# EAGLE board esquema (EAGLE 9.6.2)
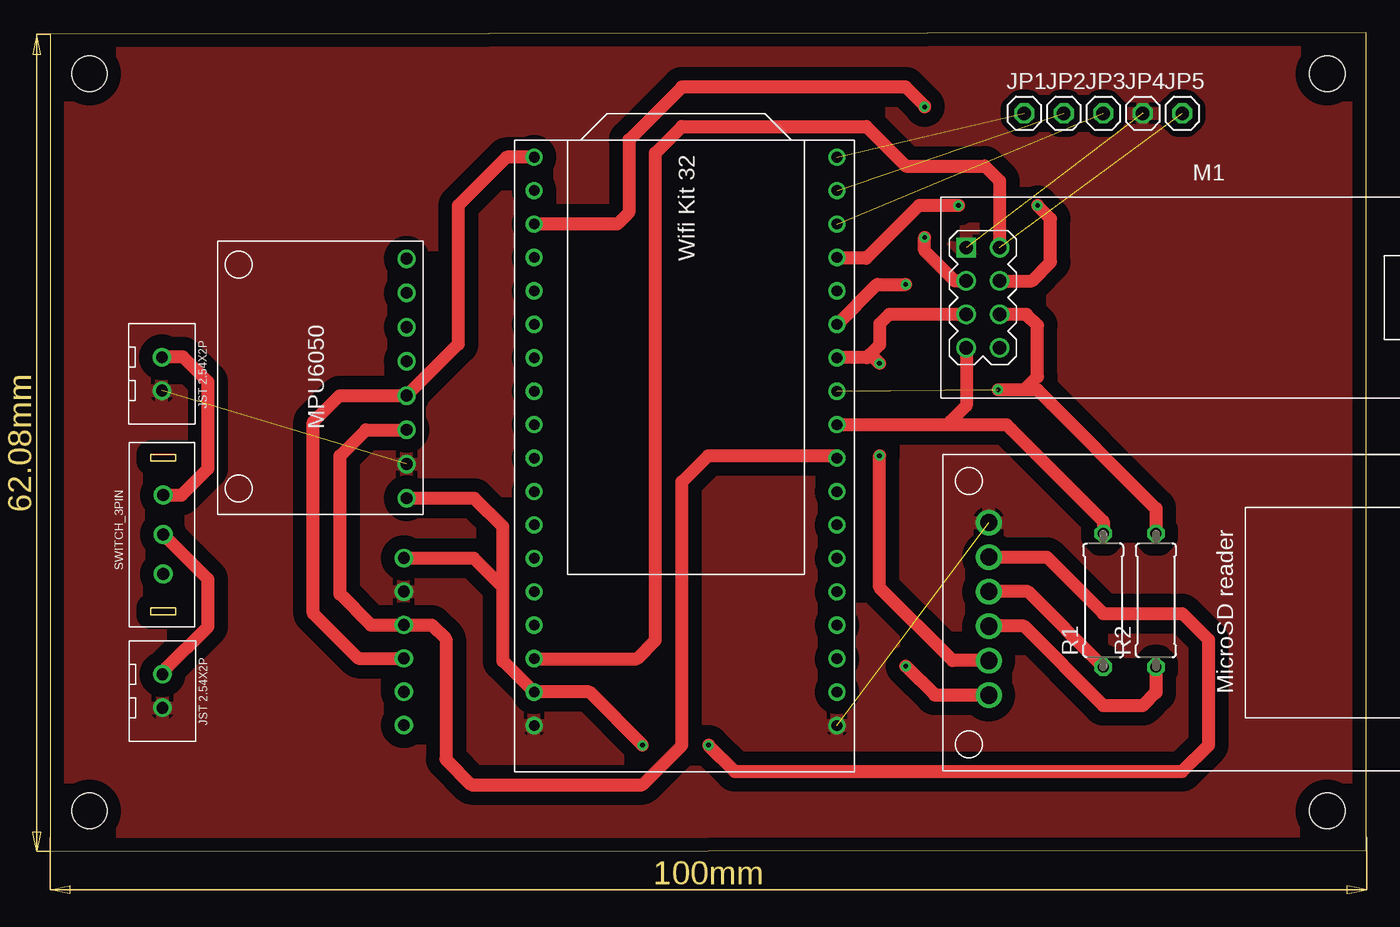
[diagram p0: board, top side]
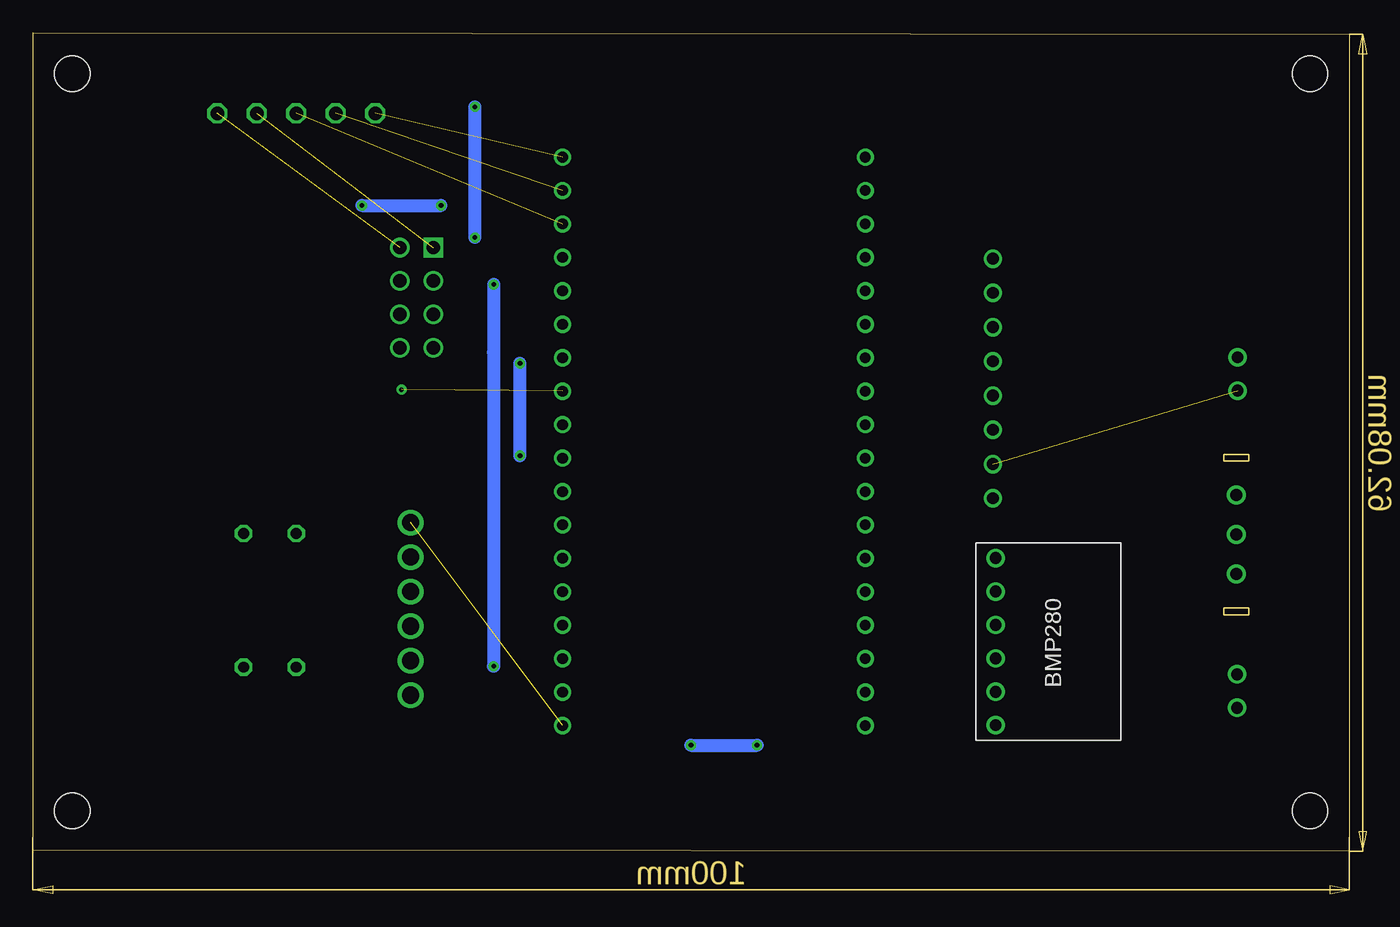
[diagram p1: board, bottom side, seen from below]

Size 99.97 x 62.19 mm. Coordinates in mm from the lower left corner, seen from the top.
Outline: 0,0 99.97,0.1 99.97,62.19 0,62.09 0,0
Copper layers (1*16): Top 0.035mm / dielectric 1.5mm / Bottom 0.035mm
Design rules "default *": minimum track width 1mm, minimum drill 0.35mm, track to track 40mil, track to pad 0.5mm, pad to pad 6mil, via to via 6mil, smd to smd 6mil, copper to edge 40mil, drill to drill 6mil, minimum pad ring 10mil, minimum via ring 8mil, stop-mask expansion 4mil, vias tented up to drill 0mil, thermal gap 10mil
Holes 2.7 mm at 97,3.08 97,59.08 3,3.08 3,59.08

## Footprints (pad centres in the part's own frame; a part is rotated, then mirrored left to right if it is on the bottom)
1X01 = drill 1.016 octagon: 1 0,0
WIRELESS-NRF24L01-PA-EXT = drill 1 square: 1 -18.415,3.81 | drill 1: 2 -15.875,3.81; 3 -18.415,1.27; 4 -15.875,1.27; 5 -18.415,-1.27; 6 -15.875,-1.27; 7 -18.415,-3.81; 8 -15.875,-3.81
0309/10 = drill 0.813 octagon: 1 -5.08,0; 2 5.08,0
BMP280_FOOTPRINT = drill 0.891: CSB 3.686,-6.12; GND -3.934,-6.12; SCL -1.395,-6.12; SDA 1.145,-6.12; SDO 6.226,-6.12; VCC -6.474,-6.12
MICROSD_READER_FOOTPRINT = drill 1.3: CS 6.195,-14.534; GND -6.905,-14.534; MISO -1.665,-14.534; MOSI 0.955,-14.534; SCK 3.575,-14.534; VCC -4.285,-14.534
MPU6050_FOOTPRINT = drill 0.891: ADO 6.686,-10.184; GND -6.314,-10.184; INT 9.286,-10.184; SCL -3.715,-10.184; SDA -1.115,-10.184; VCC -8.915,-10.184; XCL 4.085,-10.184; XDA 1.486,-10.184
WIFI_KIT32 = drill 0.8: 0 -11.77,12.73; 2 -11.77,-5.05; 3V3_1 11.23,27.97; 3V3_2 11.23,25.43; 4 -11.77,-7.59; 5 -11.77,0.03; 5V -11.77,27.97; 12 11.23,-7.59; 13 11.23,-10.13; 14 11.23,-5.05; 15 -11.77,-2.51; 16 -11.77,-12.67; 17 -11.77,-10.13; 18 -11.77,2.57; 19 -11.77,7.65; 21 11.23,-12.67; 22 -11.77,10.19; 23 -11.77,5.11; 25 11.23,2.57; 26 11.23,0.03; 27 11.23,-2.51; 32 11.23,7.65; 33 11.23,5.11; 34 11.23,12.73; 35 11.23,10.19; 36 11.23,22.89; 37 11.23,20.35; 38 11.23,17.81; 39 11.23,15.27; GND_1 -11.77,30.51; GND_2 11.23,30.51; RST -11.77,15.27; RX -11.77,20.35; TX -11.77,17.81; VEXT_1 -11.77,25.43; VEXT_2 -11.77,22.89
JST2.54X2P_FOOTPRINT = drill 0.9: 1 -1.27,0; 2 1.27,0
SWITCH_3PIN = drill 0.93: 1 -3,-1.6; 2 0,-1.6; 3 3,-1.6

## Placement (x,y rotation side)
JP1  [1X01]  74,56.08 0 top
JP2  [1X01]  77,56.08 0 top
JP3  [1X01]  80,56.08 0 top
JP4  [1X01]  83,56.08 0 top
JP5  [1X01]  86,56.08 0 top
M1  WIRELESS-NRF24L01-PA-EXT  [WIRELESS-NRF24L01-PA-EXT]  88,42.08 0 top
R1  [0309/10]  80,19.08 90 top
R2  [0309/10]  84,19.08 90 top
U$1  BMP280V1  [BMP280_FOOTPRINT]  20.75,15.82 270 bottom
U$2  MICROSD_READER  [MICROSD_READER_FOOTPRINT]  85.84,18.08 270 top
U$3  MPU6050V1  [MPU6050_FOOTPRINT]  16.9,35.75 90 top
U$4  WIFI_KIT32  [WIFI_KIT32]  48,40.08 180 top
U$5  JST2.54X2P  [JST2.54X2P_FOOTPRINT]  8.54,12.19 270 top
U$6  SWITCH_3PIN  [SWITCH_3PIN]  7,24.08 90 top
U$7  JST2.54X2P  [JST2.54X2P_FOOTPRINT]  8.5,36.28 270 top

## Library data of the parts
JP1-JP5 = pinhead
M1 = modules
R1 R2 = rcl; SPICEPREFIX: R
U$1-U$7 = CRD

## Nets
3V3_1: U$1.VCC U$2.VCC U$3.VCC U$4.3V3_1
3V3_2: JP5.1 M1.2 U$4.3V3_2
BUZZER: JP3.1 U$4.4
CE: M1.3 U$4.12
CSN_NRF: M1.4 U$4.2
GND: JP4.1 M1.1 U$1.GND U$2.GND U$3.GND U$4.GND_1 U$4.GND_2 U$5.2 U$7.2
MISO: M1.7 R1.2 U$4.19
MISO_SD: R1.1 U$2.MISO
MOSI: M1.6 R2.2 U$4.23
MOSI_SD: R2.1 U$2.MOSI
N$1: U$2.CS U$4.5
SCL: U$1.SCL U$3.SCL U$4.22
SCLK: M1.5 U$2.SCK U$4.18
SDA: U$1.SDA U$3.SDA U$4.21
SKIB1: JP1.1 U$4.16
SKIB2: JP2.1 U$4.17
V_BATTERY: U$5.1 U$6.2
VIN: U$6.3 U$7.1

## Tracks (layer width: path | path; a pad name or v marks a point on that pad's centre or on a via)
3V3_1  (via drill 0.35)
  Top 1: 34.4,20.08 34.4,14.48 U$4.3V3_1 40.97,12.11 v45,8.08 | U$1.VCC 32.19,22.29 34.4,20.08 | U$3.VCC 32.24,26.84 34.4,24.68 34.4,20.08 | v50.02,8.08 52.02,6.08 65,6.08 86,6.08 88,8.08 88,16.08 86,18.08 80,18.08 75.72,22.36 U$2.VCC
  Bottom 1: v50.02,8.08 v45,8.08
3V3_2  (1 unrouted)
  Top 1: U$4.3V3_2 44.57,14.65 45.98,16.06 45.98,53.06 48,55.08 62,55.08 65,52.08 71,52.08 72.12,50.95 M1.2
BUZZER  (1 unrouted)
CE  (via drill 0.35)
  Top 1: M1.3 68.73,43.35 66.43,45.65 v66.43,46.65 | U$4.12 43.09,47.67 43.97,48.55 43.97,54.05 48,58.08 65,58.08 66.43,56.65 v66.43,56.58
  Bottom 1: v66.43,46.65 v66.43,56.58
CSN_NRF  (via drill 0.35)
  Top 1: M1.4 74.57,43.35 76,44.78 76,48.08 v75,49.08 | v69,49.08 66,49.08 62,45.08 61.95,45.13 U$4.2
  Bottom 1: v75,49.08 v69,49.08
GND  (3 unrouted)
  pour Top: 1,61.08 1,1.08 99,1.08 99,61.08
MISO
  Top 1: M1.7 69.58,33.86 68.4,32.68 68.15,32.43 | U$4.19 68.15,32.43 | R1.2 80,25.08 73,32.08 72.65,32.43 68.15,32.43
MISO_SD
  Top 1: R1.1 74.25,19.74 U$2.MISO
MOSI  (via drill 0.35)  (1 unrouted)
  Top 1: v72,35.08 74,35.08 | 74,35.08 75,36.08 75,39.98 74.17,40.81 M1.6 | 74,35.08 75,35.08 84,26.08 R2.2
MOSI_SD
  Top 1: R2.1 84,12.08 83,11.08 80,11.08 73.95,17.12 U$2.MOSI
N$1  (via drill 0.35)
  Top 1: U$4.5 62.78,43.06 62.84,43.06 62.85,43.08 v65,43.08 | U$2.CS 67.19,11.88 v65,14.08
  Bottom 1: v65,43.08 65,37.93 65.02,37.91 65.02,14.1 v65,14.08
SCL
  Top 1: U$4.22 59.58,30.08 50,30.08 48,28.08 48,8.08 45,5.08 32,5.08 30.07,7.01 30.07,16.15 29,17.21 U$1.SCL 24.37,17.21 22.02,19.56 22.02,30.05 24,32.04 U$3.SCL
SCLK  (via drill 0.35)
  Top 1: M1.5 63.73,40.81 63,40.08 63,38.48 62.3,37.78 | U$4.18 62.03,37.51 62.3,37.78 | U$2.SCK 68.58,14.51 63,20.08 v63,30.08 | v63,37.08 62.3,37.78
  Bottom 1: v63,30.08 v63,37.08
SDA
  Top 1: U$4.21 34.67,52.75 31,49.08 31,38.55 U$3.SDA 22,34.64 20,32.64 20,18.08 23.41,14.68 U$1.SDA
SKIB1  (1 unrouted)
SKIB2  (1 unrouted)
V_BATTERY
  Top 1: U$5.1 8.67,13.75 12,17.08 12,20.68 U$6.2
VIN
  Top 1: U$6.3 10,27.08 12,29.08 12,35.68 10.1,37.58 8.53,37.58 U$7.1